# Altium PCB BCDto7-Bravo.PcbDoc
Units mil, origin at the board's own origin, x right, y up, seen from the top; angles counter-clockwise.
Board outline 3940 x 3940 mil, 2 copper layers (Top Layer, Bottom Layer), stack 11.024 mil thick; 26 components, 50 nets, 194 pads, 133 vias.
Unrouted connection lines stored in the file: 11.
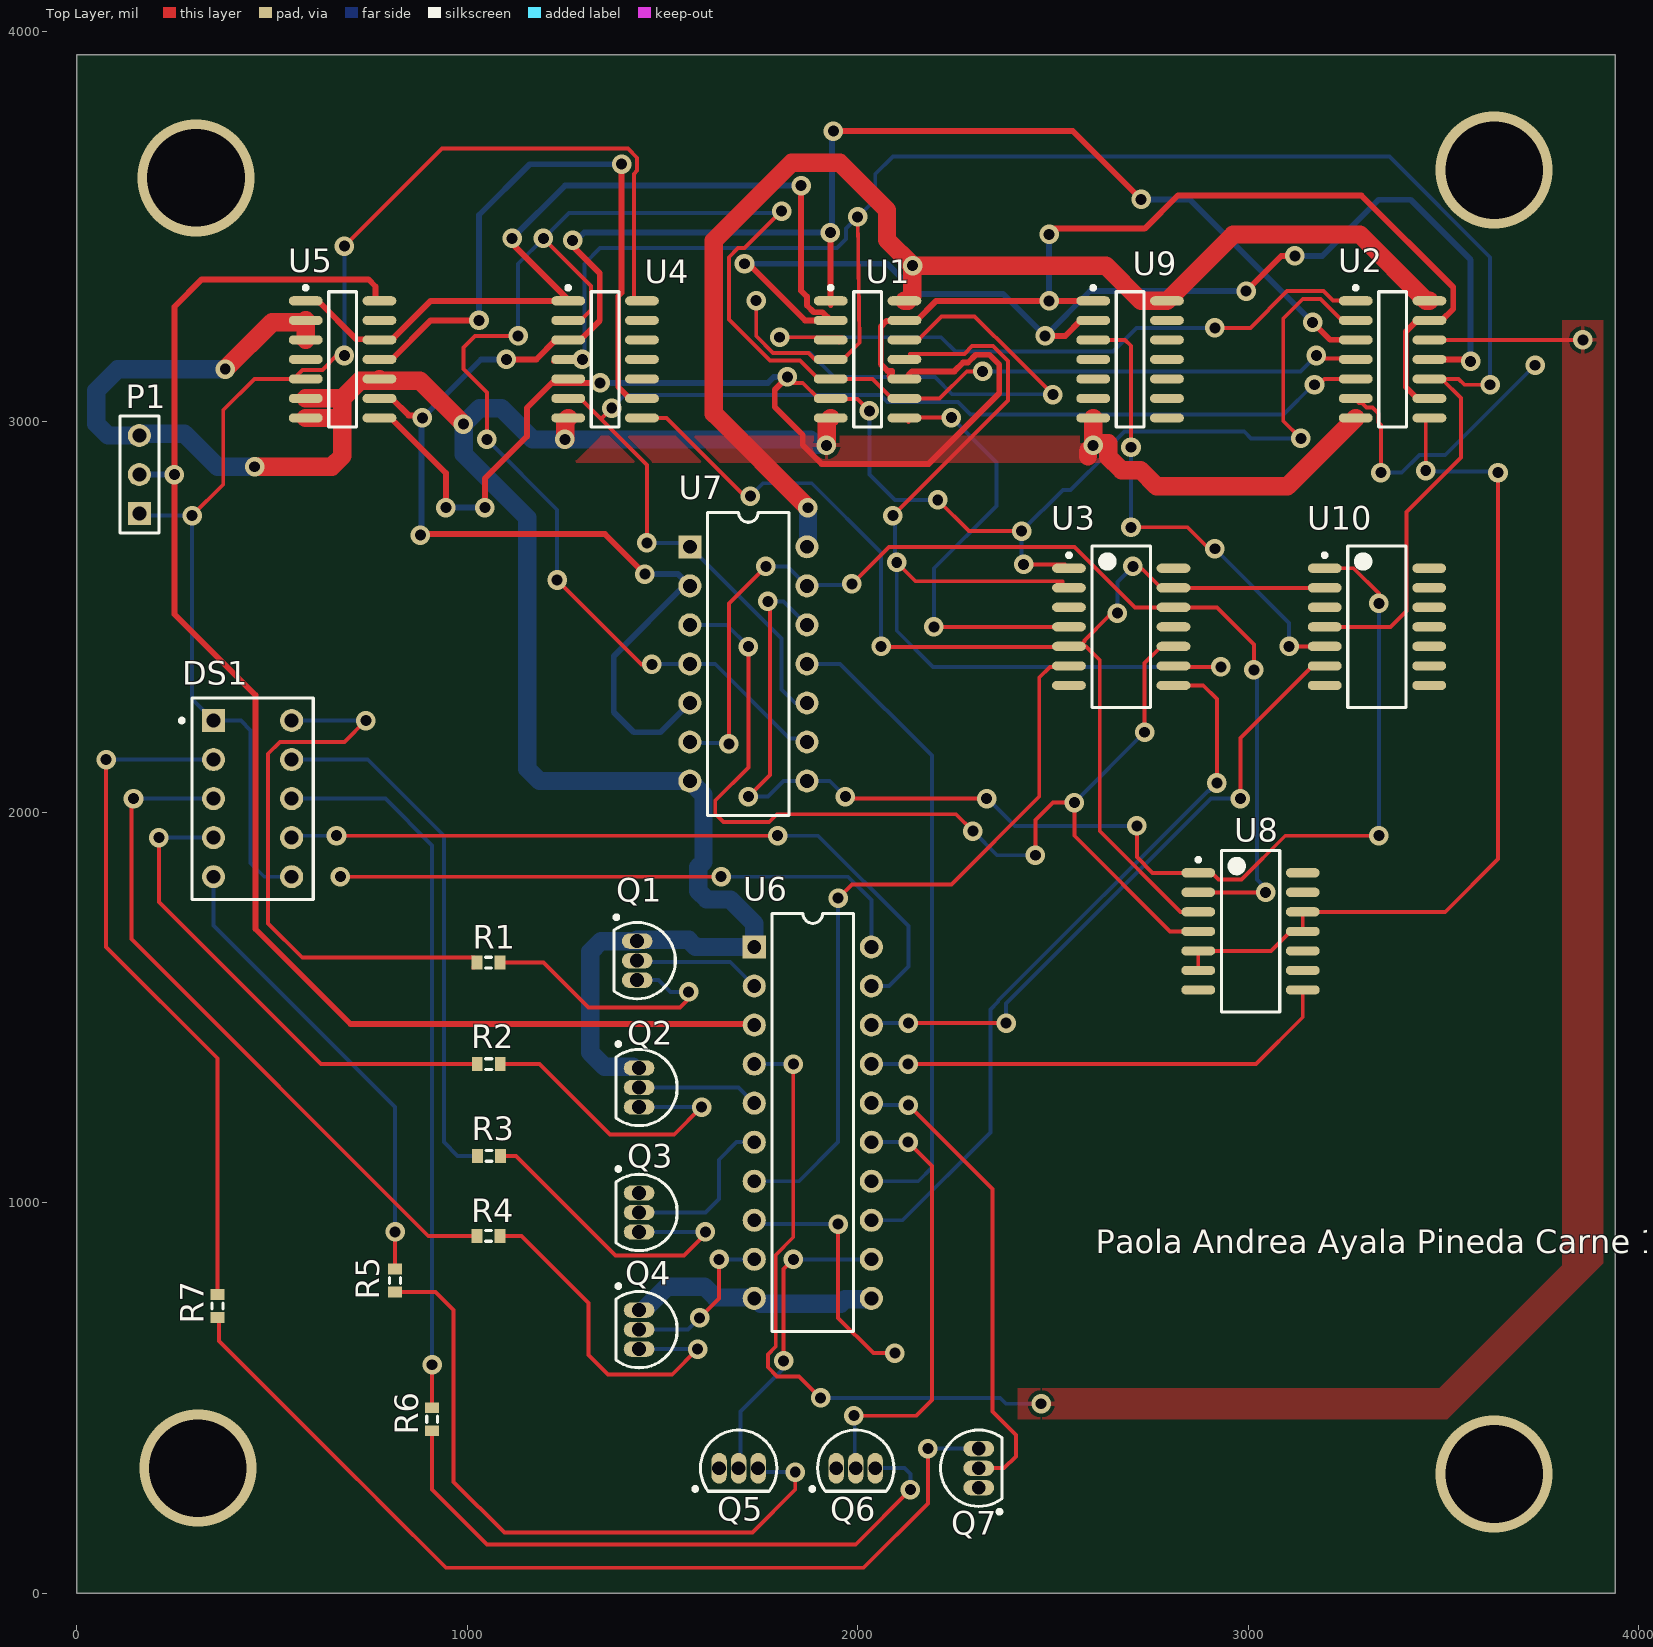
[diagram p0: Top Layer view]
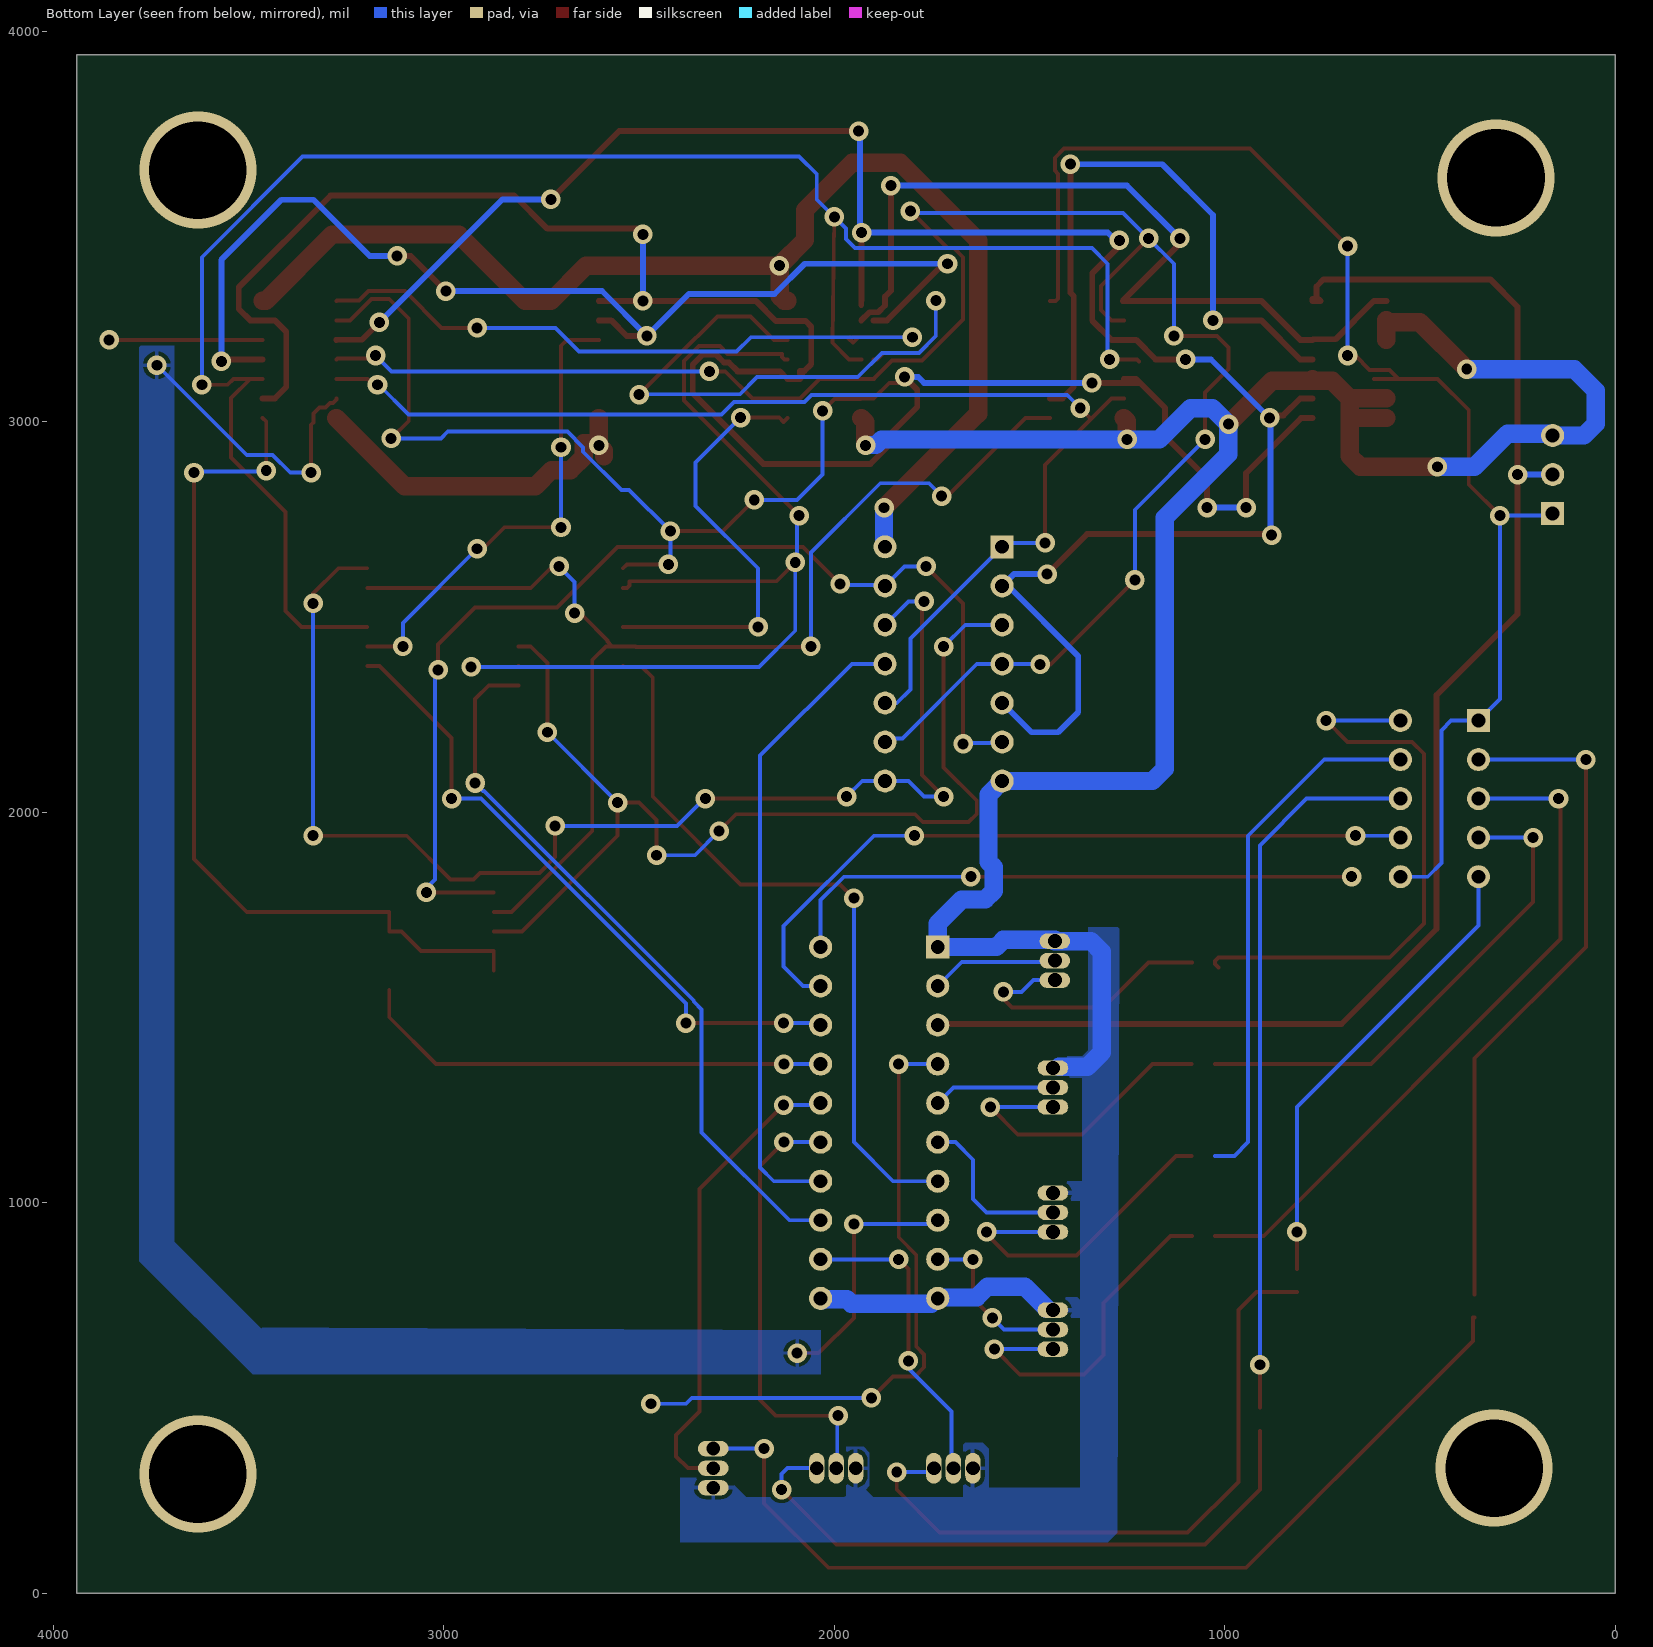
[diagram p1: Bottom Layer view, seen from below]

## Layer stack, top to bottom
Top Solder: solder mask 0.4, Solder Resist, Dk 3.5
Top Layer: signal copper 0.5118
Dielectric 1: dielectric 10, FR-4, Dk 4
Bottom Layer: signal copper 0.5118
Bottom Solder: solder mask 0.4, Solder Resist, Dk 3.5

## Board outline
0,0 3940,0 3940,3940 0,3940

## Design rules (kind name [scope] priority, off if disabled: settings)
Clearance [All] p1: gap=10 ignorepadtopadclearanceinfootprint=FALSE
ComponentClearance [All] p1: gap=16 collisioncheckmode=3 verticalgap=0 showdistances=FALSE
Height [All] p1: minheight=0 maxheight=30000 prefheight=500
HoleSize [All] p1: absolutevalues=TRUE maxlimit=125 minlimit=16 maxpercent=80.000 minpercent=20.000
HoleToHoleClearance [All] p1: gap=16 allowstackedmicrovias=FALSE
Length VCC_ [InNet('VCC')] p1: maxlimit=8000 minlimit=0
Length GND_ [InNet('GND')] p2: maxlimit=7500 minlimit=0
Length CP_ [InNet('CP')] p3: maxlimit=3800 minlimit=0
Length QA_ [InNet('QA')] p4: maxlimit=3800 minlimit=0
Length QB_ [InNet('QB')] p5: maxlimit=3800 minlimit=0
Length QC_ [InNet('QC')] p6: maxlimit=3800 minlimit=0
Length QD_ [InNet('QD')] p7: maxlimit=3800 minlimit=0
Length [All] p8: maxlimit=4000 minlimit=0
MinimumAnnularRing [All] p1: minimumring=10
MinimumSolderMaskSliver [All] p1: minsoldermaskwidth=8
PolygonConnect [All] p1: connectstyle=Relief reliefconductorwidth=10 reliefentries=4 polygonreliefangle="90 Angle" airgapwidth=10
RoutingVias [All] p1: holewidth=28 width=50 viastyle="Through Hole" minholewidth=28 minwidth=50 maxholewidth=28 maxwidth=50
ShortCircuit [All] p1: allowed=TRUE
SilkToSilkClearance [All] p1: silktosilkclearance=0
SilkToSolderMaskClearance [IsPad] p1: minsilkscreentomaskgap=0 clearancetoexposedcopper=FALSE
SolderMaskExpansion [All] p1: expansion=8
Width QD [InNet('QD')] p1: maxlimit=1000 minlimit=15 preferedwidth=15
Width QC [InNet('QC')] p2: maxlimit=1000 minlimit=15 preferedwidth=15
Width QB [InNet('QB')] p3: maxlimit=1000 minlimit=15 preferedwidth=15
Width QA [InNet('QA')] p4: maxlimit=1000 minlimit=15 preferedwidth=15
Width CP [InNet('CP')] p5: maxlimit=1000 minlimit=15 preferedwidth=15
Width VCC [InNet('VCC')] p6: maxlimit=67 minlimit=47 preferedwidth=47
Width GND [InNet('GND')] p7: maxlimit=67 minlimit=47 preferedwidth=47
22 further rules are at their usual default settings.

## Components (designator, comment, footprint, x,y, rotation, side; value= is the part's Value field where it differs from the comment)
DS1 "Dpy Amber-CA" A 450,2035 r0 top
P1 "Header 3" HDR1X3 160,2765 r90 top
Q1 "2N3904" TO-92A 1435,1620 r180 top
Q2 "2N3904" TO-92A 1440,1295 r180 top
Q3 "2N3904" TO-92A 1440,975 r180 top
Q4 "2N3904" TO-92A 1440,675 r180 top
Q5 "2N3904" TO-92A 1695,320 r270 top
Q6 "2N3904" TO-92A 1995,320 r270 top
Q7 "2N3904" TO-92A 2310,320 r0 top
R1 "Res3" J1-0603 1054.53,1615 r180 top value=220
R2 "Res3" J1-0603 1055,1355 r180 top value=220
R3 "Res3" J1-0603 1055.47,1120 r180 top value=220
R4 "Res3" J1-0603 1054.53,915 r180 top value=220
R5 "Res3" J1-0603 815,800.47 r90 top value=220
R6 "Res3" J1-0603 910,445.47 r90 top value=220
R7 "Res3" J1-0603 360,735.47 r90 top value=220
U1 "SN74LS00D" 751A-03_N 2025.26,3160 r0 top
U2 "SN74LS10D" D014_N 3370,3160 r0 top
U3 "HD74LS20FP" PRSP0014DF-B_N 2675,2475 r0 top
U4 "SN74LS04D" 751A-03_N 1352.88,3160 r0 top
U5 "DM74LS90M" M14A_N 680.51,3160 r0 top
U6 "SN74LS373N" 738-03 1885,1205 r270 top
U7 "SN74LS00N" 646-06 1720,2380 r270 top
U8 "HD74LS30FP" PRSP0014DF-B_N 3006.14,1695 r0 top
U9 "SN74LS00D" 751A-03_N 2697.63,3160 r0 top
U10 "HD74LS20FP" PRSP0014DF-B_N 3330,2475 r0 top

## Footprints (in the part's own frame and the unit in brackets; to place one, negate y for a bottom-side part, rotate by r counter-clockwise, add the part's x,y. Pads: shape width x height; smd on the part's side, far side on the other; paste and mask are expansions set on the pad)
646-06 [mm] "DIP; 14 Leads; Row Spacing 7.62 mm; Pitch 2.54 mm"
  rect 1.5x1.5 hole 0.9: 1(-7.62,-3.81)
  round 1.5 hole 0.9: 2(-5.08,-3.81) 3(-2.54,-3.81) 4(0,-3.81) 5(2.54,-3.81) 6(5.08,-3.81) 7(7.62,-3.81) 8(7.62,3.81) 9(5.08,3.81) 10(2.54,3.81) 11(0,3.81) 12(-2.54,3.81) 13(-5.08,3.81) 14(-7.62,3.81)
  silkscreen extent -9.85,-2.65 9.85,2.65
738-03 [mm] "DIP; 20 Leads; Row Spacing 7.62 mm; Pitch 2.54 mm"
  rect 1.5x1.5 hole 0.9: 1(-11.43,-3.81)
  round 1.5 hole 0.9: 2(-8.89,-3.81) 3(-6.35,-3.81) 4(-3.81,-3.81) 5(-1.27,-3.81) 6(1.27,-3.81) 7(3.81,-3.81) 8(6.35,-3.81) 9(8.89,-3.81) 10(11.43,-3.81) 11(11.43,3.81) 12(8.89,3.81) 13(6.35,3.81) 14(3.81,3.81) 15(1.27,3.81) 16(-1.27,3.81) 17(-3.81,3.81) 18(-6.35,3.81) 19(-8.89,3.81) 20(-11.43,3.81)
  silkscreen extent -13.6,-2.65 13.6,2.65
751A-03_N [mm] "SOIC, 14-Leads, Body 8.7x3.9mm, Pitch 1.27mm, IPC Medium Density"
  oval 2.2x0.6 smd: 1(-2.4,3.81) 2(-2.4,2.54) 3(-2.4,1.27) 4(-2.4,0) 5(-2.4,-1.27) 6(-2.4,-2.54) 7(-2.4,-3.81) 8(2.4,-3.81) 9(2.4,-2.54) 10(2.4,-1.27) 11(2.4,0) 12(2.4,1.27) 13(2.4,2.54) 14(2.4,3.81)
  silkscreen extent -2.52,-4.4 0.9,4.78, body extent -2,-4.38 2,4.38, height 1.75
A [mm] "LED, 7-Segment Display, 7.62 mm, RHD; 10 Leads; Row Space 5.08 mm; Pitch 2.54 mm"
  rect 1.5x1.5 hole 0.9: 1(-2.54,5.08)
  round 1.5 hole 0.9: 2(-2.54,2.54) 3(-2.54,0) 4(-2.54,-2.54) 5(-2.54,-5.08) 6(2.54,-5.08) 7(2.54,-2.54) 8(2.54,0) 9(2.54,2.54) 10(2.54,5.08)
  silkscreen extent -4.72,-6.55 3.95,6.55, body extent -3.95,-6.55 3.95,6.55, height 6.34
D014_N [mm] "SOIC, 14-Leads, Body 8.7x3.9mm, Pitch 1.27mm, IPC Medium Density"
  oval 2.2x0.6 smd: 1(-2.4,3.81) 2(-2.4,2.54) 3(-2.4,1.27) 4(-2.4,0) 5(-2.4,-1.27) 6(-2.4,-2.54) 7(-2.4,-3.81) 8(2.4,-3.81) 9(2.4,-2.54) 10(2.4,-1.27) 11(2.4,0) 12(2.4,1.27) 13(2.4,2.54) 14(2.4,3.81)
  silkscreen extent -2.52,-4.4 0.9,4.78, body extent -1.95,-4.33 1.95,4.33, height 1.75
HDR1X3 [mm] "Connector; Header; 3 Position"
  rect 1.5x1.5 hole 0.9: 1(0,0)
  round 1.5 hole 0.9: 2(2.54,0) 3(5.08,0)
  silkscreen extent -1.27,-1.27 6.35,1.27
J1-0603 [mm] "Chip Resistor, Body 1.6x0.8mm, IPC High Density"
  rect 0.7x0.9 smd: 1(-0.75,0) 2(0.75,0)
  silkscreen extent -0.2,-0.35 0.2,0.35, body extent -0.85,-0.48 0.85,0.48, height 0.9
M14A_N [mm] "SOIC, 14-Leads, Body 8.6x3.9mm, Pitch 1.27mm, IPC Medium Density"
  oval 2.2x0.6 smd: 1(-2.4,3.81) 2(-2.4,2.54) 3(-2.4,1.27) 4(-2.4,0) 5(-2.4,-1.27) 6(-2.4,-2.54) 7(-2.4,-3.81) 8(2.4,-3.81) 9(2.4,-2.54) 10(2.4,-1.27) 11(2.4,0) 12(2.4,1.27) 13(2.4,2.54) 14(2.4,3.81)
  silkscreen extent -2.52,-4.4 0.9,4.78, body extent -2,-4.38 2,4.38, height 1.75
PRSP0014DF-B_N [mm] "SOP, 14-Leads, Body 10.06x5.5mm, Pitch 1.27mm, IPC Medium Density"
  oval 2.2x0.6 smd: 1(-3.4,3.81) 2(-3.4,2.54) 3(-3.4,1.27) 4(-3.4,0) 5(-3.4,-1.27) 6(-3.4,-2.54) 7(-3.4,-3.81) 8(3.4,-3.81) 9(3.4,-2.54) 10(3.4,-1.27) 11(3.4,0) 12(3.4,1.27) 13(3.4,2.54) 14(3.4,3.81)
  silkscreen extent -3.52,-5.25 1.9,5.25, body extent -2.7,-5.25 2.7,5.25, height 2.2
TO-92A [mm] "TO, Flat Index; 3 In-Line, Axial Leads; Body Dia. 4.5mm; Leads 0.51 x 0.48 mm (max)"
  oval 2x1 hole 0.9: 1(0,-1.27) 2(0,0) 3(0,1.27)
  silkscreen extent -2.48,-2.95 1.5,2.48, body extent -2.48,-2.5 1.5,2.5, height 6.86

## Part data
DS1: "7.62 mm Black Surface Orange 7-Segment Display: CA, RH DP", Colour=Orange, ComponentLink1Description="Manufacturer Link", ComponentLink1URL=http://www.agilent.com/, DatasheetVersion=19-Feb-2002, LatestRevisionDate=17-Dec-2003, LatestRevisionNote="Schematic revised, PCB Footprint replaced.", MinimumIntensity="354 ucd", Note="IF = 5 mA", PackageDescription="LED, 7-Segment Display, 7.62 mm, RHD; 10 Leads; Row Space 5.08 mm; Pitch 2.54 mm", PackageReference=A, PackageVersion=11-Feb-2002, Published=8-Jun-2000, Publisher="Altium Limited"
P1: "Header, 3-Pin", LatestRevisionDate=17-Jul-2002, LatestRevisionNote="Re-released for DXP Platform.", Publisher="Altium Limited"
Q1 Q2 Q3 Q4 Q5 Q6 Q7: "NPN General Purpose Amplifier", ComponentLink1Description="Manufacturer Link", ComponentLink1URL=http://www.fairchildsemi.com/, ComponentLink2Description=Datasheet, ComponentLink2URL=http://www.fairchildsemi.com/ds/2N%2F2N3904.pdf, DatasheetVersion=1997, LatestRevisionDate=15-Jan-2003, LatestRevisionNote="PCB Footprint 'BCY-W3/D4.7' replaced", PackageDescription="TO, Flat Index; 3 In-Line, Axial Leads; Body Dia. 4.5mm; Leads 0.51 x 0.48 mm (max)", PackageReference=TO-92A, PackageVersion=Sep-1998, Published=8-Jun-2000, Publisher="Altium Limited"
R1 R2 R3 R4 R5 R6 R7: "Resistor", LatestRevisionDate=29-May-2009, LatestRevisionNote="IPC-7351 Footprint Added.", PackageDescription="Chip Resistor", PackageReference=J1-0603, Published=8-Jun-2000, Publisher="Altium Limited"
U1 U7 U9: "Quad 2-Input NAND Gate", ComponentAvailability="Not for New Design", ComponentLink1Description="Manufacturer Link", ComponentLink1URL=http://www.onsemi.com/, ComponentLink2Description=Datasheet, ComponentLink2URL=http://www.onsemi.com/pub/Collateral/SN74LS00-D.PDF, DatasheetVersion=Dec-1999, Published=15-Apr-2002, Publisher="Altium Limited"
  U1 U9: Code_IPC=SOIC127P600-14, Code_JEDEC=MS-012-AB, LatestRevisionDate=13-Apr-2006, LatestRevisionNote="IPC-7351 Footprint Added.", PackageDescription="14-Pin Small Outline Integrated Circuit 1.27 mm Pitch", PackageReference=751A-03
  U7: PackageDescription="DIP; 14 Leads; Row Spacing 7.62 mm; Pitch 2.54 mm", PackageReference=646-06, PackageVersion=1995
U2: "Triple 3-Input Positive-NAND Gate", Code_IPC=SOIC127P600-14, ComponentLink1Description="Manufacturer Link", ComponentLink1URL=http://www.ti.com/, ComponentLink2Description=Datasheet, ComponentLink2URL=http://www-s.ti.com/sc/ds/sn74ls10.pdf, DatasheetVersion=Mar-1988, LatestRevisionDate=13-Apr-2006, LatestRevisionNote="IPC-7351 Footprint Added.", PackageDescription="14-Pin Small Outline Integrated Circuit 1.27 mm Pitch", PackageReference=D014, PackageVersion=Jan-1998, Published=8-Jun-2000, Publisher="Altium Limited"
U3 U10: "Dual 4-Input NAND Gates", Code_JEITA=P-SOP14-5.5x10.06-1.27, ComponentLink1Description="Manufacturer Link", ComponentLink1URL=http://sg.renesas.com/fmwk.jsp?cnt=hd74ls_root.jsp&fp=/products/standard_ic/general_purpose_logic/5v_standard_logic/hd74ls/, ComponentLink2Description=Datasheet, ComponentLink2URL=http://documentation.renesas.com/eng/products/logic/rej03d0400_hd74ls20.pdf, ComponentLink3Description="Packaging Specification", ComponentLink3URL=http://sg.renesas.com/media/products/common_info/package/pdf/ic/code/prsp0014df_b.pdf, DatasheetVersion="Rev.2.00, Feb-2005", PackageDescription="14-Pin Plastic Small Outline Package, 10.06 x 5.5 mm Body, 1.27 mm Pitch", PackageReference=PRSP0014DF-B, PackageVersion=Sep-2005, Published=10-Feb-2010, Publisher="Altium Limited"
U4: "Hex Inverter", Code_IPC=SOIC127P600-14, Code_JEDEC=MS-012-AB, ComponentLink1Description="Manufacturer Link", ComponentLink1URL=http://www.onsemi.com/, ComponentLink2Description=Datasheet, ComponentLink2URL=http://www.onsemi.com/pub/Collateral/SN74LS04-D.PDF, DatasheetVersion=1999, LatestRevisionDate=13-Apr-2006, LatestRevisionNote="IPC-7351 Footprint Added.", PackageDescription="14-Pin Small Outline Integrated Circuit 1.27 mm Pitch", PackageReference=751A-03, Published=15-Apr-2002, Publisher="Altium Limited"
U5: "Decade and Binary Counter", Code_IPC=SOIC127P600-14, ComponentLink1Description="Manufacturer Link", ComponentLink1URL=http://www.fairchildsemi.com/, DatasheetVersion=Mar-1998, LatestRevisionDate=13-Apr-2006, LatestRevisionNote="IPC-7351 Footprint Added.", Note="NC pins 4 and 13 are not drawn.", PackageDescription="14-Pin Small Outline Integrated Circuit 1.27 mm Pitch", PackageReference=M14A, PackageVersion=2000, Published=17-Jul-2002, Publisher="Altium Limited"
U6: "Octal Transparent Latch with 3-State Outputs", Code_JEDEC=MS-001-AD, ComponentLink1Description="Manufacturer Link", ComponentLink1URL=http://www.onsemi.com/, ComponentLink2Description=Datasheet, ComponentLink2URL=http://www.onsemi.com/pub/Collateral/SN74LS373-D.PDF, DatasheetVersion=Dec-1999, PackageDescription="DIP; 20 Leads; Row Spacing 7.62 mm; Pitch 2.54 mm", PackageReference=738-03, PackageVersion=1996, Published=15-Apr-2002, Publisher="Altium Limited"
U8: "8-Input NAND Gate", Code_JEITA=P-SOP14-5.5x10.06-1.27, ComponentLink1Description="Manufacturer Link", ComponentLink1URL=http://sg.renesas.com/fmwk.jsp?cnt=hd74ls_root.jsp&fp=/products/standard_ic/general_purpose_logic/5v_standard_logic/hd74ls/, ComponentLink2Description=Datasheet, ComponentLink2URL=http://documentation.renesas.com/eng/products/logic/rej03d0404_hd74ls30.pdf, ComponentLink3Description="Packaging Specification", ComponentLink3URL=http://sg.renesas.com/media/products/common_info/package/pdf/ic/code/prsp0014df_b.pdf, DatasheetVersion="Rev.2.00, Feb-2005", PackageDescription="14-Pin Plastic Small Outline Package, 10.06 x 5.5 mm Body, 1.27 mm Pitch", PackageReference=PRSP0014DF-B, PackageVersion=Sep-2005, Published=10-Feb-2010, Publisher="Altium Limited"

## Via types
v1: diameter 50, hole 28, Top Layer to Bottom Layer, 129 vias
v2: diameter 300, hole 250, Top Layer to Bottom Layer, 4 vias

## Nets (pads, with @x,y where several pads share a name; then routed paths per layer and width w, separated by ;. In a path a pad name is that pad's centre, name@x,y a point inside that pad or via, vN(x,y) a via of type N, cw(c..) or ccw(c..) an arc to the next point about the centre after c; other vN are vias at no path point)
a: DS1.10 R1.2 | length 1512.4
  Top Layer w10: 740,2235 685,2180 520,2180 490,2150 490,1715 577.28,1627.72 1016.22,1627.72 1025,1618.94 R1.2 1025,1611.06 R1.2@1016.22,1602.28
  Bottom Layer w10: DS1.10 550,2240 555,2235 740,2235
ax: U2.12 U6.4 | length 2039.3
  Top Layer w10: v1(1835,1355) 1835,911.57 1790,866.57 1790,631.57 1770,611.57 1770,578.43 1793.43,555 1850,555 v1(1905,500) ; U2.12 v1(3857.5,3210)
  Bottom Layer w10: U6.4 1739.97,1359.97 U6.4@1744.97,1354.97 ; U6.4@1745,1355 v1(1835,1355) ; v1(1905,500) 2365,500 2380,485 v1(2470,485)
b: DS1.9 R3.2 | length 1355.3
  Bottom Layer w10: DS1.9 745,2135 940,1940 940,1155 975,1120 1025,1120
B1: Q1.2 U6.2 | length 326.9
  Bottom Layer w10: Q1.2 1438.5,1616.5 1673.5,1616.5 U6.2
B2: Q2.2 U6.5 | length 311.6
  Bottom Layer w10: Q2.2 1695,1295 U6.5
B3: Q3.2 U6.6 | length 428.1
  Bottom Layer w10: Q3.2 1610,975 1645,1010 1645,1110 1690,1155 U6.6
B4: Q4.2 U6.9 | length 433.1
  Top Layer w10: 1595,705 1645,755 v1(1645,855)
  Bottom Layer w10: Q4.2 1565,675 1595,705 ; v1(1645,855) U6.9 U6.9@1735,850
B5: Q5.2 U6.12 | length 793
  Top Layer w10: v1(1810,595) 1810,830 v1(1835,855)
  Bottom Layer w10: Q5.2 1700,325 1700,465 1810,575 v1(1810,595) ; v1(1835,855) U6.12
B6: Q6.2 U6.15 | length 1141.4
  Top Layer w10: v1(1990,454.43) 2150.29,454.43 2190,494.14 2190,1094.1 v1(2129.1,1155)
  Bottom Layer w10: v1(1990,454.43) 1992.5,451.93 1992.5,322.5 Q6.2 ; U6.15 2045,1145 2055,1155 v1(2129.1,1155)
B7: Q7.2 U6.16 | length 1218.4
  Top Layer w10: v1(2130,1250) 2345,1035 2345,465 2405,405 2405,350 2375,320 Q7.2
  Bottom Layer w10: U6.16 2040,1250 v1(2130,1250)
bx: U2.6 U6.8 | length 1384.2
  Top Layer w10: v1(1950,945) 1950,705 2040,615 v1(2095,615) ; U2.6 3275.51,3057.2 3284.21,3048.5 3291.46,3048.5 3303.15,3036.81 3318.11,3036.81 3333.82,3021.11 3333.82,2998.89 3340,2992.71 v1(3340,2870)
  Bottom Layer w10: U6.8 1740,960 1755,945 v1(1950,945) ; v1(3340,2870) 3393.43,2870 3438.43,2915 3505,2915 v1(3735,3145)
c: DS1.8 R6.2 | length 1849.7
  Top Layer w10: R6.2 v1(910,585)
  Bottom Layer w10: DS1.8 790,2035 910,1915 v1(910,585)
C1: Q1.3 R1.1 | length 701.9
  Top Layer w10: R1.1 1195,1615 1310,1500 1545,1500 1566.82,1521.82 v1(1566.82,1540)
  Bottom Layer w10: Q1.3 1490,1570 1520,1540 v1(1566.82,1540)
C2: Q2.3 R2.1 | length 779
  Top Layer w10: R2.1 1185,1355 1365,1175 1530,1175 v1(1600,1245)
  Bottom Layer w10: Q2.3 v1(1600,1245)
C3: Q3.3 R3.1 | length 826.9
  Top Layer w10: R3.1 1125,1120 1380,865 1555,865 1612.5,922.5
  Bottom Layer w10: Q3.3 1610,925
C4: Q4.3 R4.1 | length 908.1
  Top Layer w10: R4.1 1138.4,915 1310,743.4 1310,610 1360,560 1525,560 v1(1590,625)
  Bottom Layer w10: Q4.3 v1(1590,625)
C5: Q5.3 R5.1 | length 1727.6
  Top Layer w10: R5.1 919.06,770.94 965,725 965,285 1095,155 1730,155 1840,265 1840,310
  Bottom Layer w10: Q5.3 1755,310 1840,310
C6: Q6.3 R6.1 | length 1628.1
  Top Layer w10: R6.1 910,265 1050,125 1995,125 2135,265
  Bottom Layer w10: Q6.3 2120,320 2135,305 2135,265
C7: Q7.3 R7.1 | length 2458.9
  Top Layer w10: R7.1 363.94,705.94 363.94,646.06 687.26,322.74 754.08,255.92 783.07,226.93 945,65 2015,65 2180,230 2180,370
  Bottom Layer w10: 2180,370 Q7.3
CP: P1.2 U5.14 U6.3 | length 3766.3
  Top Layer w15: U5.14@775,3314.31 U5.14 754.99,3310 765,3320.01 765,3346.81 746.81,3365 320,3365 250,3295 v1(250,2865) 250,2507.35 457.35,2300 457.35,1700.83 700.68,1457.5 1732.5,1457.5 U6.3
  Bottom Layer w15: P1.2 v1(250,2865)
cx: U6.17 U8.8 | length 1224.7
  Top Layer w10: v1(2129.1,1355) 3020,1355 3140,1475 U8.8
  Bottom Layer w10: U6.17 v1(2129.1,1355)
d: DS1.5 R5.2 | length 1197.6
  Top Layer w10: R5.2 815,925
  Bottom Layer w10: DS1.5 350,1710 815,1245 815,925
DP: DS1.7 U6.19 | length 1897
  Top Layer w10: v1(665,1940) v1(1795,1940)
  Bottom Layer w10: DS1.7 555,1940 v1(665,1940) ; v1(1795,1940) 1898.28,1940 2130,1708.28 2130,1605 2080,1555 U6.19
dx: U6.14 U7.11 | length 1641.8
  Bottom Layer w10: U7.11 1955,2380 2190,2145 2190,1090.04 2154.96,1055 U6.14
e: DS1.4 R2.2 | length 1292.4
  Top Layer w10: 210,1935 210,1770 625,1355 R2.2
  Bottom Layer w10: 210,1935 DS1.4
ex: U3.6 U6.7 | length 1897.7
  Top Layer w10: v1(1950,1780) 1985,1815 2240,1815 2465,2040 2465,2345 2492.39,2372.39 2538.54,2372.39 U3.6
  Bottom Layer w10: U6.7 1850,1055 1950,1155 v1(1950,1780)
f: DS1.2 R7.2 | length 1763.1
  Top Layer w10: v1(75,2135) 75,1655 360,1370 R7.2
  Bottom Layer w10: v1(75,2135) DS1.2
fx: U6.18 U10.6 | length 1662.5
  Top Layer w10: v1(2130,1460) v1(2380,1460) ; v1(2980,2035) 2980,2190.35 3164.65,2375 U10.6
  Bottom Layer w10: U6.18 2040,1460 v1(2130,1460) ; v1(2380,1460) 2380,1510 2905,2035 v1(2980,2035)
g: DS1.3 R4.2 | length 1766.9
  Top Layer w10: v1(145,2035) 140,2030 140,1675 900,915 R4.2
  Bottom Layer w10: v1(145,2035) DS1.3
GND: P1.3 Q1.1 Q2.1 Q3.1 Q4.1 Q5.1 Q6.1 Q7.1 U1.7 U2.7 U4.7 U5.2 U5.3 U5.6 U5.7 U5.10 U6.1 U6.10 U6.11 U7.7 U9.7 | length 7563.2
  Top Layer w47: v1(380,3135) 500.31,3255.31 581.33,3255.31 U5.2 U5.3 ; v1(455,2885) 652.47,2885 680,2912.53 680,3010 ; U5.7 680,3010 ; U5.6 586.6,3060.58 680,3060.58 ; v1(990,2994.28) 878.96,3105.31 779.69,3105.31 U5.10 770.31,3105.31 724.74,3105.31 680,3060.58 ; v1(1250,2955) 1250.57,2955.57 1250.57,3002.18 U4.7 ; v1(1920,2940) 1920.57,2940.57 1920.57,2999.81 U1.7 ; 2590,2912.33 2590,2926.05 2603.14,2939.19 v1(2603.14,2940) v1@2603.14,2945 ; U9.7 v1@2603.14,2945 ; U2.7 3100.51,2835 2765.73,2835 2724.23,2876.5 2675.77,2876.5 2641.5,2910.77 2641.5,2945 v1@2603.14,2945 ; 680,3010 680,3060.58
  Bottom Layer w47: P1.3@160,2960 170,2970 275,2970 360,2885 v1(455,2885) ; P1.3 80,2965 50,2995 50,3080 105,3135 v1(380,3135) ; Q2.1@1424.13,1348.18 1351.82,1348.18 1315,1385 1315,1642.47 1342.53,1670 Q1.1 ; Q1.1@1435,1673.18 1566.82,1673.18 1585,1655 U6.1 1735,1715 1673.5,1776.5 1613.5,1776.5 1591.5,1798.5 1591.5,1859.23 1605,1872.73 1605,2045 U7.7 1185,2080 1153.25,2111.75 1153.25,2754.71 990.57,2917.39 990.57,2993.7 v1(990,2994.28) 990.81,2994.28 1031.54,3035 1087.5,3035 1167.5,2955 v1(1250,2955) 1879.19,2955 1893.61,2940.57 1919.43,2940.57 v1(1920,2940) ; Q4.1@1455.87,728.81 1512.06,785 1607.74,785 1635.43,757.31 1732.69,757.31 U6.10 1738.26,755 1751.76,741.5 1956.3,741.5 1967.5,752.69 2032.69,752.69 2030,750 2035,750 U6.11
gx: U3.8 U6.13 | length 1876
  Top Layer w10: U3.8 2885,2325 2920,2290 v1(2920,2075)
  Bottom Layer w10: U6.13 2115,955 2340,1180 2340,1495 2360,1515 2360,1518.28 2896.72,2055 2900,2055 v1(2920,2075)
N1: U1.3 U2.1 | length 1770.5
  Top Layer w10: v1(1800,3216.81) U1.3@1937.58,3216.81 ; v1(2915,3240.57) 3005.57,3240.57 3100,3335 3193.28,3335 3217.2,3311.08 3274.43,3311.08 U2.1 ; U1.3@1937.58,3216.81 1952.87,3216.81 1956.49,3213.19 1960.12,3216.81 1963.74,3213.19 1959.7,3209.15 1958.88,3209.97 1951.65,3202.74 U1.3@1937.58,3216.81
  Bottom Layer w10: v1(1800,3216.81) 2213.77,3216.81 2250.58,3180 2653.52,3180 2714.09,3240.57 v1(2915,3240.57)
N2: U1.6 U2.2 U3.1 | length 2459.6
  Top Layer w10: v1(1820,3115) 1820,3109.27 1829.27,3100 1859.27,3100 1899.27,3060 U1.6 1932.33,3058.43 1999.9,3058.43 v1(2030,3028.33) ; v1(2205,2800) 2285,2720 v1(2420,2720) ; v1(2425,2635) 2531.14,2635 U3.1 ; v1(3135,2957.5) 3090,3002.5 3090,3265 3140,3315 3185,3315 3240,3260 U2.2
  Bottom Layer w10: v1(2030,3028.33) 2030,2865 2095,2800 v1(2205,2800) ; v1(2425,2635) 2420,2640 v1(2420,2720) 2525.54,2825.54 2545.25,2825.54 2643.14,2923.43 2643.14,2934.71 2683.43,2975 2990,2975 3007.5,2957.5 v1(3135,2957.5)
N3: U1.11 U3.2 U3.9 | length 2582.3
  Top Layer w10: v1(2090,2760) 2385,3055 2385,3156.23 2346.92,3194.31 2293.08,3194.31 2273.08,3174.31 2134.05,3174.31 2134.05,3166.29 2127.76,3160 U1.11 ; v1(2100,2640) 2148.19,2591.81 2524.33,2591.81 2524.33,2581.29 2530.62,2575 U3.2 ; U3.9 2811.46,2372.39 v1(2930,2372.39)
  Bottom Layer w10: v1(2090,2760) 2095,2755 2095,2645 v1(2100,2640) 2100,2465 2192.61,2372.39 v1(2930,2372.39)
N4: U1.8 U3.4 | length 1124.8
  Top Layer w10: U1.8 2129.94,2999.81 2140.86,3010.73 v1(2240,3010.73) ; v1(2195,2475) U3.4
  Bottom Layer w10: v1(2195,2475) 2195,2625 2355,2785 2355,2895.73 v1(2240,3010.73)
N5: U3.10 U7.3 U8.4 | length 2753.3
  Top Layer w10: v1(1720,2424.53) 1720,2115 1635,2030 1635,1995.86 1655.86,1975 1773.43,1975 1793.43,1995 2251.72,1995 v1(2295,1951.72) ; v1(2455,1890) 2455,1980 2500,2025 v1(2555,2025) 2555,1940 2800,1695 U8.4 ; v1(2735,2205) 2735,2382.64 2777.36,2425 U3.10
  Bottom Layer w10: U7.3 1664.53,2480 v1(1720,2424.53) ; v1(2295,1951.72) 2356.72,1890 v1(2455,1890) ; v1(2555,2025) v1(2735,2205)
N6: U3.5 U3.13 U4.8 U8.3 U10.2 | length 3158
  Top Layer w10: U4.8 1510,3010 1710,2810 v1(1725,2810) ; v1(2060,2425) 2061.25,2423.75 2508.4,2423.75 2509.65,2425 U3.5 U3.5@2568.95,2425 ; v1(2665,2510) 2657.35,2502.35 2642.96,2502.35 2581.01,2440.4 2581.01,2437.06 U3.5@2568.95,2425 ; v1(2705,2630) 2712.65,2622.35 2730.02,2622.35 2777.36,2575 U3.13 U10.2 ; U8.3 2826.72,1745 2620,1951.72 2620,2390 2585,2425 U3.5@2568.95,2425
  Bottom Layer w10: v1(1725,2810) 1757.67,2842.67 1882.33,2842.67 2060,2665 v1(2060,2425) ; v1(2665,2510) 2665,2590 v1(2705,2630)
N7: U3.12 U7.6 U7.13 U8.2 | length 2832.2
  Top Layer w10: v1(1670,2175) 1670,2535 v1(1765,2630) ; v1(1985,2585) 2080,2680 2555.55,2680 2710.55,2525 U3.12 2920,2525 3015,2430 v1(3015,2365) ; U8.2 v1(3045,1795)
  Bottom Layer w10: U7.6 1572.5,2177.5 1667.5,2177.5 v1(1670,2175) ; v1(1765,2630) 1820,2630 U7.13 1872.5,2582.5 1982.5,2582.5 v1(1985,2585) ; v1(3015,2365) 3023.2,2356.8 3023.2,1827.62 3045,1805.82 v1(3045,1795)
N8: U7.8 U7.12 U8.1 U10.1 | length 3264.5
  Top Layer w10: v1(1720,2040) 1775,2095 1775,2535 v1(1770,2540) ; v1(1968.43,2040) 1973.43,2035 v1(2330,2035) ; v1(2715,1965) 2715,1885 2755,1845 U8.1 2907.47,1845 2924.28,1828.19 2983.19,1828.19 3095,1940 v1(3335,1940) ; U10.1 3270,2625 3335,2560 v1(3335,2535)
  Bottom Layer w10: v1(1720,2040) 1770,2040 1810,2080 U7.8 1928.43,2080 v1(1968.43,2040) ; v1(1770,2540) 1810,2540 U7.12 ; v1(2330,2035) 2332.5,2035 2402.5,1965 2543.75,1965 v1(2715,1965) ; v1(3335,1940) v1(3335,2535)
N9: U2.8 U8.5 U8.6 U8.11 U8.12 | length 2260.3
  Top Layer w10: U8.6 U8.5 3058.5,1645 3108.5,1695 U8.11 U8.12 3505,1745 3640,1880 v1(3640,2870) ; v1(3455,2875) 3455,3000.51 U2.8
  Bottom Layer w10: v1(3455,2875) 3457.5,2872.5 3637.5,2872.5 v1(3640,2870)
N10: U9.3 U10.5 | length 1225.7
  Top Layer w10: U9.3 2685,3210 2700,3195 v1(2700,2935) ; v1(2700,2730) 2845,2730 2900,2675 v1(2915,2675) ; v1(3105,2425) U10.5
  Bottom Layer w10: v1(2700,2730) v1(2700,2935) ; v1(2915,2675) 3105,2485 v1(3105,2425)
N11: U1.4 U1.12 U2.10 U4.4 U10.4 | length 6395.8
  Top Layer w10: U4.4@1219.69,3155 1224.69,3160 U4.4 v1(1295,3160) ; v1(1740,3310.77) 1740,3220.24 1783.43,3176.81 1873.96,3176.81 1890.77,3160 U1.4@1899.27,3160 ; U1.4 1962.26,3160 2005,3202.74 v1(2000,3525) ; U1.12 2154.93,3210 2214.93,3270 2299.52,3270 2405,3164.52 2405.48,3164.52 v1(2500,3070) ; U10.4 3365,2475 3405.55,2515.55 3405.55,2768.98 3545,2908.43 3545,3060.98 U2.10@3495.98,3110 ; U2.10 U2.10@3495.98,3110 ; v1(3620,3095) 3554.31,3095 3539.31,3110 U2.10@3495.98,3110
  Bottom Layer w10: v1(1295,3160) 1300,3165 1300,3405 1340,3445 1946.57,3445 1970,3468.43 1970,3495 2045,3570 2045,3635 2090,3680 3361.65,3680 3620,3421.65 v1(3620,3095) ; v1(1740,3310.77) 1740,3220.24 1783.43,3176.81 1878.19,3176.81 1940,3115 2197.5,3115 2241.77,3070.73 2499.27,3070.73 v1(2500,3070)
N12: U1.5 U1.9 U2.4 U4.2 U7.4 U7.9 | length 4961.6
  Top Layer w10: v1(1050,2955) 1050,3075 990,3135 990,3190 1020,3220 v1(1130,3220) ; v1(1195,3470) 1316.7,3348.3 1316.7,3286.81 1289.89,3260 U4.2 ; v1(1230,2595) 1446.1,2378.9 v1(1473.05,2378.9) ; v1(1805,3540) 1710,3445 1693.43,3445 1670,3421.57 1670,3261.96 1775.15,3156.81 1852.46,3156.81 1898.43,3110.84 1898.43,3110 2038.25,3110 2088.25,3060 2210,3060 2279.31,3129.31 v1(2320,3129.31) ; v1(3175,3170) 3182.39,3162.61 3272.91,3162.61 U2.4
  Bottom Layer w10: v1(1050,2955) 1230,2775 v1(1230,2595) ; v1(1130,3220) 1130,3405 v1(1195,3470) 1260,3535 1800,3535 v1(1805,3540) ; v1(1473.05,2378.9) 1473.6,2379.45 1569.45,2379.45 U7.4 1635,2380 1825.61,2189.39 1860.61,2189.39 U7.9 ; v1(2320,3129.31) 3134.31,3129.31 v1(3175,3170)
N13: U2.5 U4.6 U7.1 U7.10 | length 3149.8
  Top Layer w10: U4.6 1289.89,3060 1342.45,3007.45 ; v1(1370,3035) 1342.45,3007.45 ; v1(1460,2690) 1460,2889.89 1342.45,3007.45 ; v1(3170,3095) 3180.82,3095 3195.82,3110 U2.5
  Bottom Layer w10: v1(1370,3035) 1403.33,3068.33 2058.38,3068.33 2075.99,3050.73 2256.57,3050.73 2288.86,3018.43 3090.2,3018.43 3166.77,3095 v1(3170,3095) ; v1(1460,2690) 1560,2690 U7.1 1805,2445 1805,2315 1840,2280 U7.10 U7.10@1875,2280
QA: U1.2 U2.11 U4.1 U5.1 U5.12 U9.2 | length 5065.5
  Top Layer w15: U5.1 617.52,3310 715.87,3211.65 773.35,3211.65 U5.12 806.5,3210 906.5,3310 U4.1 1261.02,3310 1115,3456.02 v1(1115,3470) ; v1(1710,3405) 1720,3405 1865,3260 U1.2@1899.27,3260 ; v1(1855,3605) 1855,3335.77 1869.96,3320.81 1869.96,3297.86 1887.13,3280.69 1910.08,3280.69 U1.2 ; v1(2480,3220) 2531.64,3220 2571.64,3260 U9.2 ; v1(2995,3335) 3085,3425 v1(3120,3425) ; U2.11 3565,3160 v1(3570,3155)
  Bottom Layer w15: v1(1115,3470) 1250,3605 v1(1855,3605) ; v1(1710,3405) 2075.76,3405 2153.26,3327.5 2372.5,3327.5 v1(2480,3220) 2595,3335 v1(2995,3335) ; v1(3120,3425) 3190,3425 3333.79,3568.79 3416.21,3568.79 3570,3415 v1(3570,3155)
QB: U1.1 U2.3 U4.3 U5.9 U7.2 U7.5 | length 5308
  Top Layer w15: U5.9 806.5,3060 849.8,3016.7 878.3,3016.7 v1(885,3010) ; v1(880,2710) 882.5,2712.5 1352.5,2712.5 v1(1455,2610) ; v1(1100,3160) 1176.9,3160 1226.9,3210 U4.3 1289.89,3210 1339.2,3259.31 1339.2,3380.8 1270,3450 v1(1270,3465) ; v1(1930,3485) 1930,3310.77 U1.1 U1.1@1930.77,3299.23 ; v1(1937.65,3745) 2550.79,3745 v1(2725.79,3570) ; v1(3165,3255) 3209.7,3210.3 3275.22,3210.3 U2.3
  Bottom Layer w15: v1(880,2710) 880,2715 882.5,2717.5 882.5,3007.5 v1(885,3010) 1035,3160 v1(1100,3160) ; v1(1270,3465) 1279.47,3465 1299.47,3485 v1(1930,3485) 1933.83,3488.83 1933.83,3741.17 v1(1937.65,3745) ; v1(1455,2610) 1540,2610 U7.2 1555,2580 1375,2400 1375,2256.54 1426.54,2205 1495,2205 U7.5 ; v1(2725.79,3570) 2850,3570 v1(3165,3255)
QC: U1.10 U1.13 U2.9 U2.13 U4.5 U5.8 U9.1 | length 5152.2
  Top Layer w15: U5.8 804.16,3010 945,2869.16 v1(945,2780.23) ; v1(1045,2780.23) 1045,2855 1152.5,2962.5 1152.5,3035.6 1216.9,3100 ; U4.5 1226.9,3110 1216.9,3100 ; v1(1340,3100) 1216.9,3100 ; 1820,3115 1787.5,3082.5 1787.5,3038.23 1859.27,2966.46 1859.27,2940.62 1907.4,2892.5 2181.88,2892.5 2362.5,3073.12 2362.5,3146.91 2337.6,3171.81 2302.4,3171.81 2282.4,3151.81 2269.99,3151.81 2247.49,3129.31 2139.05,3129.31 U1.10 2088.25,3110 2080.82,3117.43 2087.5,3124.11 2087.5,3130.69 2076.11,3130.69 2058.94,3147.86 2058.94,3243.94 2073.35,3258.35 2149.59,3258.35 2201.24,3310 v1(2490,3310) U9.1 ; v1@2490.27,3479.73 2505.54,3495 2735,3495 2820,3580 3290,3580 3525.3,3344.7 3525.3,3289.31 3495.98,3260 U2.13 3432.99,3260 3403.68,3230.69 3403.68,3089.31 3432.99,3060 U2.9
  Bottom Layer w15: v1(945,2780.23) v1(1045,2780.23) ; v1(1340,3100) 1770,3100 1785,3115 1820,3115 ; v1(2490,3310) v1(2490,3480)
QD: U4.9 U5.11 | length 1632.4
  Top Layer w15: U5.11 806.5,3160 906.5,3260 v1(1030,3260) ; v1(1395,3660) 1395,3330.58 1386.56,3322.14 1386.56,3089.31 1415.88,3060 U4.9
  Bottom Layer w15: v1(1030,3260) 1030,3530 1160,3660 v1(1395,3660)
VCC: U1.14 U2.14 U7.14 U9.14 | length 3236.4
  Top Layer w47: v1(1872.5,2780) 1631.5,3021 1631.5,3464.23 1830.77,3663.5 1954.23,3663.5 2075,3542.73 2075,3465.86 v1(2140.86,3400) ; U1.14 2127.86,3310 2139.55,3321.69 2139.55,3397.88 2140.86,3399.19 v1(2140.86,3400) ; U2.14 3456.37,3310 3286.37,3480 2962.12,3480 U9.14 2725.79,3310 2635.79,3400 v1(2140.86,3400)
  Bottom Layer w47: U7.14 1870,2682.27 1872.5,2684.77 v1(1872.5,2780)
VDD: DS1.1 DS1.6 P1.1 U4.14 U5.5 U6.20 | length 5046.7
  Top Layer w10: v1(295,2760) 375,2840 375,3030 455,3110 U5.5@554.53,3110 ; U5.5@617.52,3110 U5.5 U5.5@554.53,3110 ; 675,1835 v1(1650,1835) ; v1(685,3170) 665.44,3170 628.63,3133.19 577.72,3133.19 U5.5@554.53,3110 ; v1(685,3450) 935,3700 1411.57,3700 1435,3676.57 1435,3643.43 1426.56,3635 1426.56,3316.29 1432.86,3310 U4.14
  Bottom Layer w10: P1.1 P1.1@184.53,2789.53 ; P1.1@165,2760 v1(295,2760) 295,2290 DS1.1 420,2235 445,2210 445,1870 480,1835 DS1.6 ; v1(685,3170) v1(685,3450) ; v1(1650,1835) 1975,1835 2035,1775 U6.20
pads on no net: U3.3 U3.7 U3.11 U3.14 U4.10 U4.11 U4.12 U4.13 U5.4 U5.13 U8.7 U8.9 U8.10 U8.13 U8.14 U9.4 U9.5 U9.6 U9.8 U9.9 U9.10 U9.11 U9.12 U9.13 U10.3 U10.7 U10.8 U10.9 U10.10 U10.11 U10.12 U10.13 U10.14
copper on no net: | length 0
  other v1: 2135,265 1840,310 2180,370 1595,705 815,925 1610,925 675,1835 210,1935 740,2235
  other v2: 3630,305 310,320 305,3625 3630,3645

## Polygon pours and split planes (outlines as drawn)
bx on Bottom Layer "Bottom Layer-bx" (solid, pour order 38): 2035,673.9 2035,560 2266.39,560 3490,560 3780,850 3780,3195 3690,3195 3690,900 3467.5,677.5 3465,680 3470,680 3295,680
no net on Bottom Layer "Bottom Layer-No Net" (solid, pour order 40): 3485,665
GND on Bottom Layer "Bottom Layer-GND" (solid, pour order 24): 1270,1705 1350,1705 1350,1390 1365,1375 1490,1375 1490,1325 1495,1320 1365,1320 1365,1055 1480,1055 1480,1050 1500,1030 1480,1010 1480,995 1465,1010 1460,1005 1370,1005 1370,750 1377.31,757.31 1470,757.31 1500,727.31 1500,715 1495,715 1480,700 1475,705 1370,705 1370,270 1605,270 1605,370 1620,385 1665,385 1670,380 1670,245 1900,245 1920,265 1910,275 1910,360 1925,375 1970,375 1970,250 1975,245 2225,245 2275,295 2395,295 2395,130 1300,130 1275,155
no net on Bottom Layer "Bottom Layer-No Net 1" (solid, pour order 20): 2125,425
GND on Bottom Layer "Bottom Layer-GND 1" (solid, pour order 14): 1605,1580
GND on Top Layer "Top Layer-GND" (solid, pour order 52): 1240,2965 2640,2965 2645,2960 2640,2955 2640,2895 1245,2895 1240,2900
ax on Top Layer "Top Layer-ax" (solid, pour order 30): 2410,525 2410,445 3510,445 3910,845 3910,3260 3805,3260 3805,840 3490,525
no net on Top Layer "Top Layer-No Net" (solid, pour order 32): 3145,970

## Silkscreen, mask and mechanical layers (free items; w line width, h text height)
Top Overlay:
  text "Paola Andrea Ayala Pineda Carne 19091" at 2610,870 h60